# EAGLE board schematic (EAGLE 9.4.2)
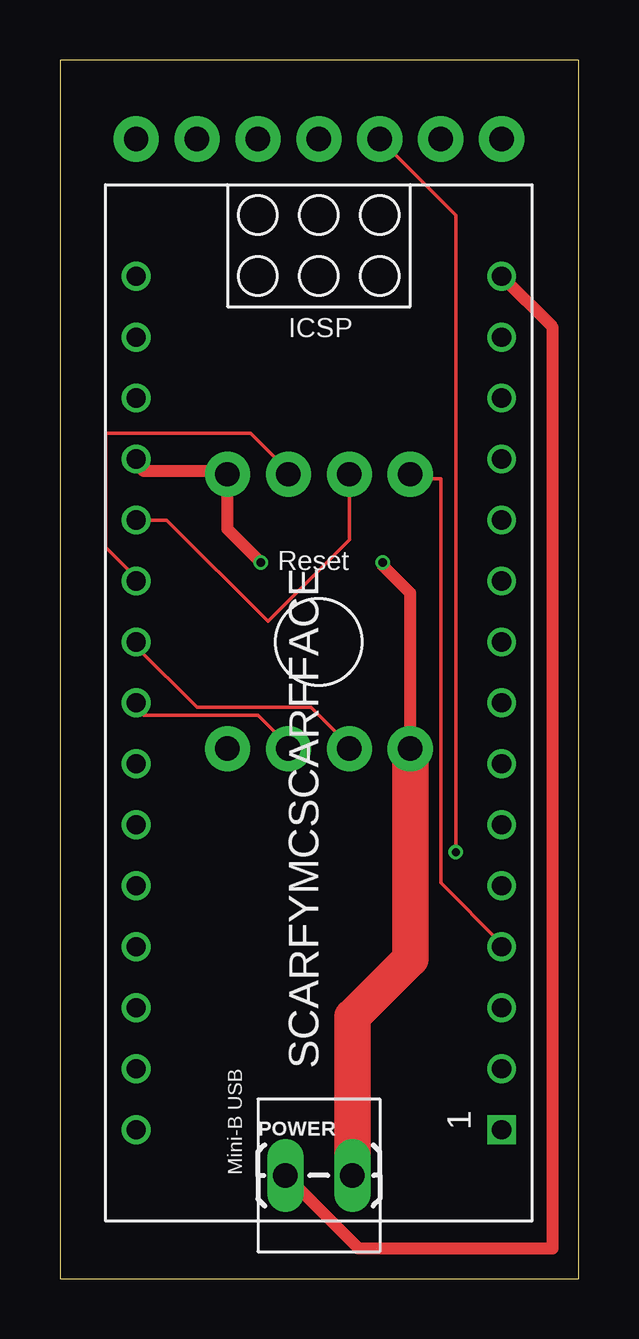
[diagram p0: board, top side]
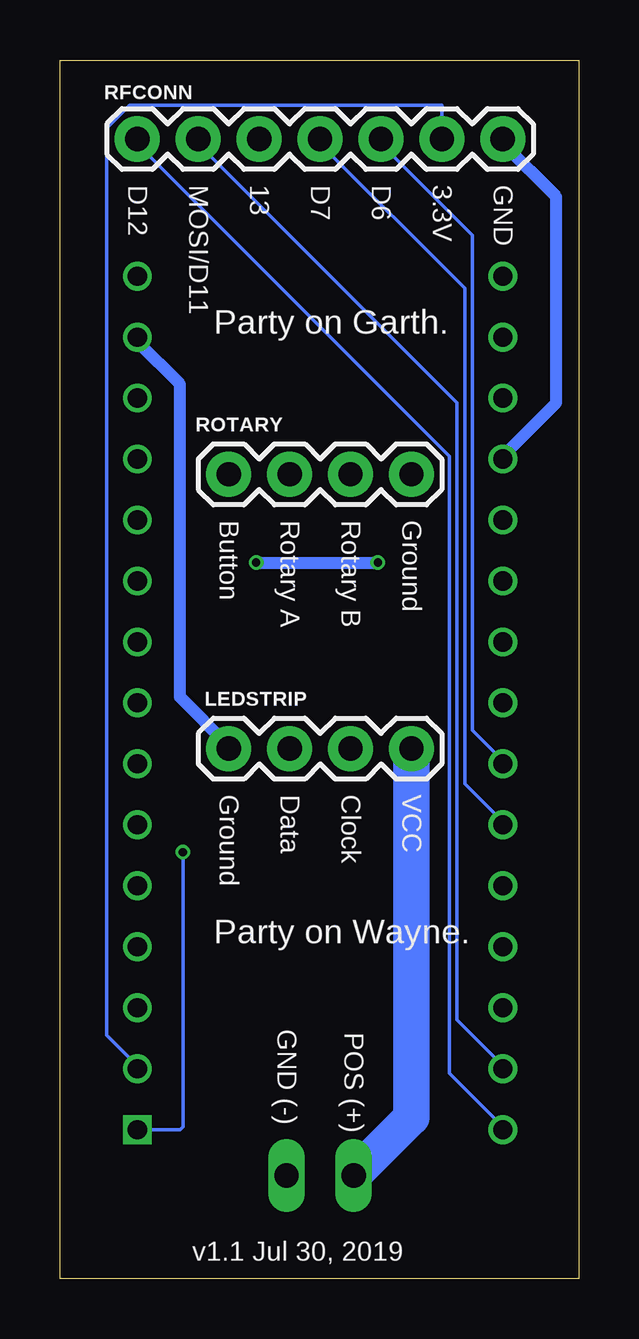
[diagram p1: board, bottom side, seen from below]

Size 21.64 x 50.79 mm. Coordinates in mm from the lower left corner, seen from the top.
Outline: 0,0 21.64,0 21.64,50.79 0,50.79 0,0
Copper layers (1*16): Top 0.035559375mm / dielectric 1.6mm / Bottom 0.035559375mm
Design rules "oshpark-2layer": minimum track width 6mil, minimum drill 10mil, track to track 6mil, track to pad 6mil, pad to pad 6mil, via to via 6mil, smd to smd 6mil, copper to edge 15mil, drill to drill 6mil, minimum pad ring 5mil, minimum via ring 5mil, stop-mask expansion 2.5mil, vias tented up to drill 0mil, thermal gap 10mil

## Footprints (pad centres in the part's own frame; a part is rotated, then mirrored left to right if it is on the bottom)
1X04 = drill 1.016 pad 1.88: 1 0,0; 2 2.54,0; 3 5.08,0; 4 7.62,0
1X02_LOCK_LONGPADS = drill 1.016 long: 1 -0.127,0; 2 2.667,0
1X07 = drill 1.016 pad 1.88: 1 0,0; 2 2.54,0; 3 5.08,0; 4 7.62,0; 5 10.16,0; 6 12.7,0; 7 15.24,0
ARDUINO_NANO = drill 0.8 square: 1 -20.32,-7.62 | drill 0.8: 2 -17.78,-7.62; 3 -15.24,-7.62; 4 -12.7,-7.62; 5 -10.16,-7.62; 6 -7.62,-7.62; 7 -5.08,-7.62; 8 -2.54,-7.62; 9 0,-7.62; 10 2.54,-7.62; 11 5.08,-7.62; 12 7.62,-7.62; 13 10.16,-7.62; 14 12.7,-7.62; 15 15.24,-7.62; 16 15.24,7.62; 17 12.7,7.62; 18 10.16,7.62; 19 7.62,7.62; 20 5.08,7.62; 21 2.54,7.62; 22 0,7.62; 23 -2.54,7.62; 24 -5.08,7.62; 25 -7.62,7.62; 26 -10.16,7.62; 27 -12.7,7.62; 28 -15.24,7.62; 29 -17.78,7.62; 30 -20.32,7.62

## Placement (x,y rotation side)
LEDSTRIP  [1X04]  14.61,22.1 0 bottom
POWER  [1X02_LOCK_LONGPADS]  9.53,4.32 0 top
RFCONN  [1X07]  18.41,47.5 0 bottom
ROTARY  [1X04]  14.61,33.53 0 bottom
SCARFYMCSCARFFACE  [ARDUINO_NANO]  10.79,26.54 90 top

## Library data of the parts
LEDSTRIP ROTARY = SparkFun-Connectors; PROD_ID: CONN-09696
POWER RFCONN = SparkFun-Connectors
SCARFYMCSCARFFACE = ArduinoNanoV30

## Nets
5V: SCARFYMCSCARFFACE.12
GND: LEDSTRIP.1 POWER.2 RFCONN.7 ROTARY.4 SCARFYMCSCARFFACE.14 SCARFYMCSCARFFACE.19
N$1: RFCONN.6 SCARFYMCSCARFFACE.2
N$2: RFCONN.5 SCARFYMCSCARFFACE.24
N$3: RFCONN.4 SCARFYMCSCARFFACE.25
N$4: RFCONN.3 SCARFYMCSCARFFACE.1
N$5: RFCONN.2 SCARFYMCSCARFFACE.29
N$6: RFCONN.1 SCARFYMCSCARFFACE.30
N$8: LEDSTRIP.2 SCARFYMCSCARFFACE.22
N$9: ROTARY.3 SCARFYMCSCARFFACE.21
N$10: ROTARY.2 SCARFYMCSCARFFACE.20
N$11: ROTARY.1 SCARFYMCSCARFFACE.4
N$12: LEDSTRIP.4 POWER.1 SCARFYMCSCARFFACE.15
N$13: LEDSTRIP.3 SCARFYMCSCARFFACE.23

## Tracks (layer width: path | path; a pad name or v marks a point on that pad's centre or on a via)
GND  (via drill 0.35)
  Top 0.152: 3.17,33.97 SCARFYMCSCARFFACE.19 | 6.98,33.66 ROTARY.4 | 13.46,29.72 v13.46,29.84
  Top 0.508: 3.17,33.97 3.49,33.66 6.98,33.66 | LEDSTRIP.1 14.61,28.57 13.46,29.72 | v8.38,29.84 6.98,31.24 ROTARY.4
  Top 1.524: POWER.2 12.19,10.92 14.61,13.33 LEDSTRIP.1
  Bottom 0.152: 14.61,22.22 LEDSTRIP.1 | 3.17,34.29 SCARFYMCSCARFFACE.19
  Bottom 0.254: 18.41,39.05 SCARFYMCSCARFFACE.14
  Bottom 0.508: 18.41,39.05 16.64,37.28 16.64,24.26 14.61,22.22 | 3.17,34.29 0.95,36.51 0.95,45.09 3.17,47.31 RFCONN.7 | v13.46,29.84 v8.38,29.84
N$1
  Bottom 0.152: RFCONN.6 5.71,48.9 18.73,48.9 19.68,47.94 19.68,10.16 18.41,8.89 SCARFYMCSCARFFACE.2
N$2
  Bottom 0.152: SCARFYMCSCARFFACE.24 3.17,21.59 4.45,22.86 4.45,43.5 8.26,47.31 RFCONN.5
N$3
  Bottom 0.152: SCARFYMCSCARFFACE.25 3.17,19.05 4.76,20.64 4.76,41.28 10.79,47.31 RFCONN.4
N$4  (via drill 0.35)
  Top 0.152: RFCONN.3 16.51,44.32 v16.51,17.78
  Bottom 0.152: v16.51,17.78 16.51,6.35 16.64,6.22 SCARFYMCSCARFFACE.1
N$5
  Bottom 0.152: SCARFYMCSCARFFACE.29 3.17,8.89 5.08,10.79 5.08,36.51 15.88,47.31 RFCONN.2
N$6
  Bottom 0.152: SCARFYMCSCARFFACE.30 3.17,6.35 5.4,8.57 5.4,34.29 18.41,47.31 RFCONN.1
N$8
  Top 0.152: SCARFYMCSCARFFACE.22 3.17,26.35 5.71,23.81 10.48,23.81 12.06,22.22 LEDSTRIP.2
N$9
  Top 0.152: SCARFYMCSCARFFACE.21 3.17,29.21 1.91,30.48 1.91,35.24 7.94,35.24 9.53,33.66 ROTARY.3
N$10
  Top 0.152: SCARFYMCSCARFFACE.20 4.45,31.62 8.67,27.4 12.06,30.8 ROTARY.2
N$11
  Top 0.152: SCARFYMCSCARFFACE.4 18.41,13.97 15.88,16.51 15.88,33.34 14.61,33.34 ROTARY.1
N$12
  Top 0.508: POWER.1 12.45,1.27 20.55,1.27 20.55,39.65 SCARFYMCSCARFFACE.15
  Bottom 1.524: POWER.1 6.98,6.73 LEDSTRIP.4
N$13
  Top 0.152: SCARFYMCSCARFFACE.23 3.17,23.81 3.49,23.5 8.26,23.5 9.53,22.22 LEDSTRIP.3

## Text on the board
bPlace: GND | 3.3V | D6 | D7 | 13 | MOSI/D11 | D12 | Party on Garth. | Ground | Rotary B | Rotary A | Button | VCC | Clock | Data | Ground | Party on Wayne. | POS (+) | GND (-) | v1.1 Jul 30, 2019